# Altium PCB PCM2706 USB DAC Stick (Rev.5).PcbDoc
Units mil, origin at the board's own origin, x right, y up, seen from the top; angles counter-clockwise.
Board outline 2620 x 732.44 mil, 2 copper layers (Top Layer, Bottom Layer); 29 components, 21 nets, 93 pads, 20 vias.
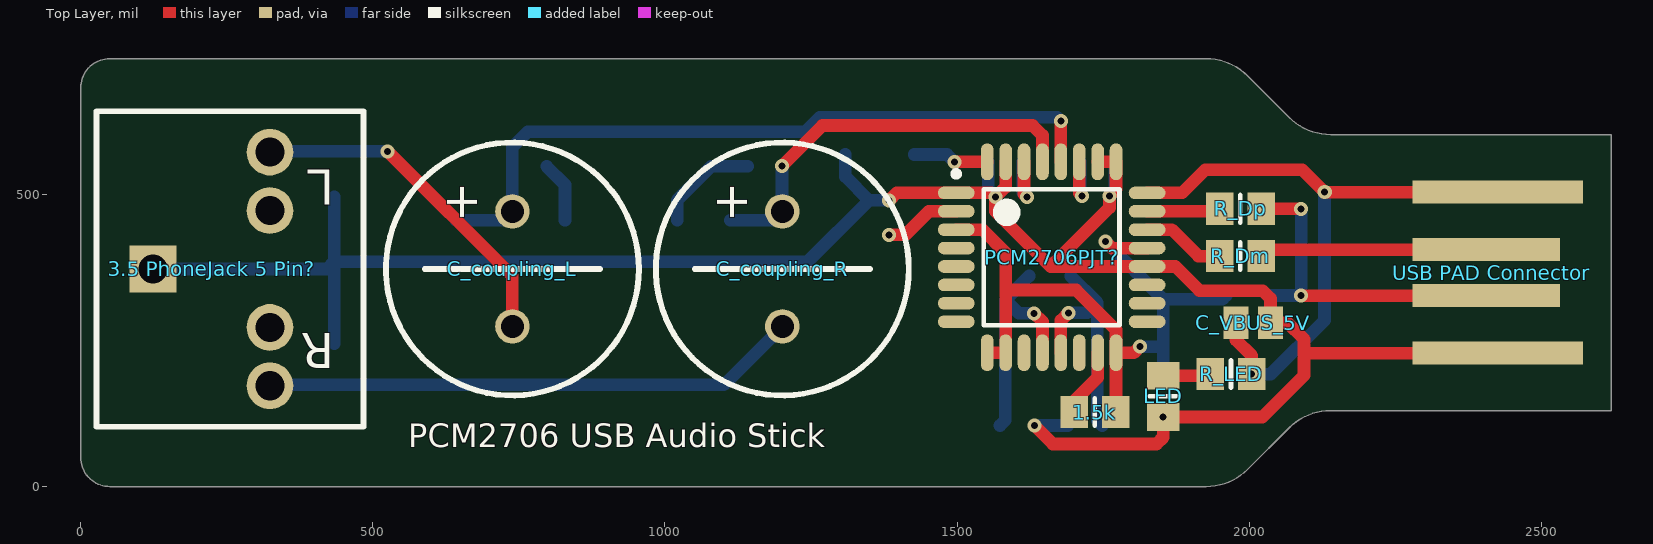
[diagram p0: Top Layer view]
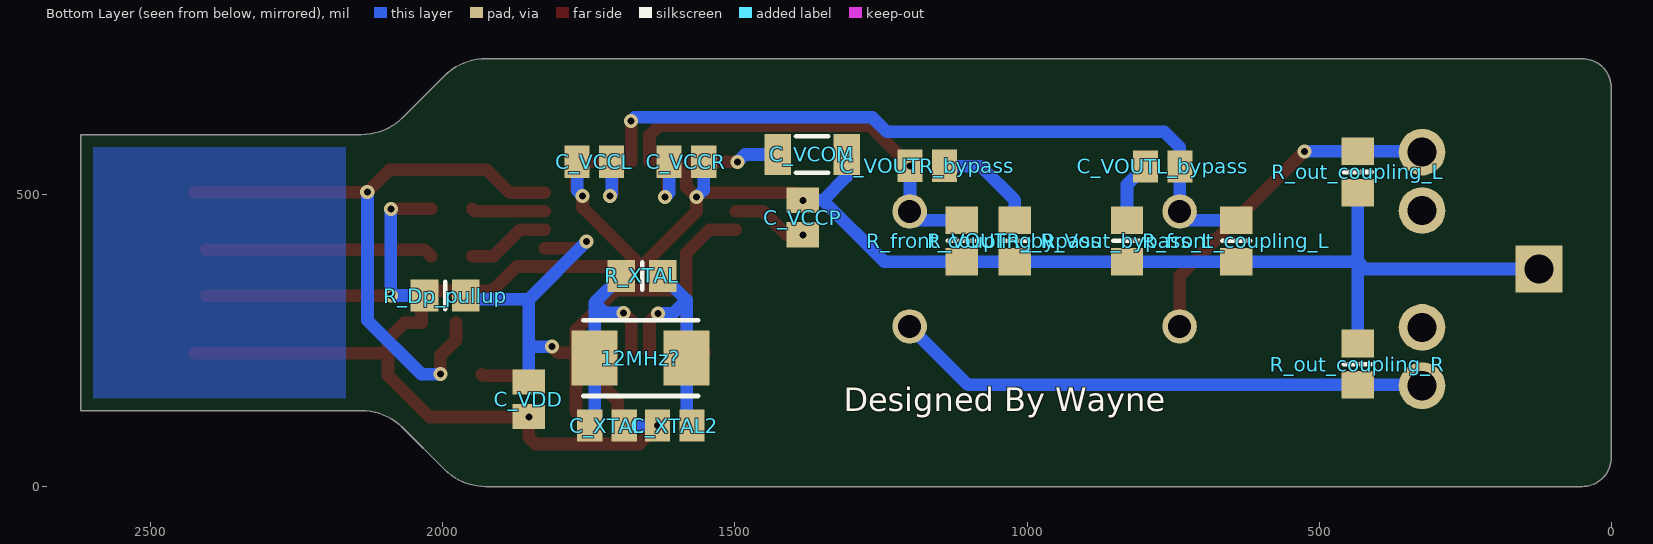
[diagram p1: Bottom Layer view, seen from below]

## Layer stack, top to bottom
Top Layer: signal copper 1.4
Dielectric: dielectric 12.6, FR-4, Dk 4.8
Bottom Layer: signal copper 1.4

## Board outline
50,0 cw(c50,50) 0,50 0,682.44 cw(c50,682.44) 50,732.44 1889.26,732.44 1926.58,732.44 cw(c1926.58,632.44) 1997.29,703.15 2062.64,637.8 2068.71,631.73 ccw(c2139.42,702.44) 2139.42,602.44 2176.74,602.44 2620,602.44 2620,130 2176.74,130 2139.42,130 ccw(c2139.42,30) 2068.71,100.71 2062.64,94.64 2003.36,35.36 1997.29,29.29 cw(c1926.58,100) 1926.58,0 50,0

## Design rules (kind name [scope] priority, off if disabled: settings)
Clearance [All] p1: gap=7
PolygonConnect [All] p1: connectstyle=Relief reliefconductorwidth=10 reliefentries=4 polygonreliefangle="90 Angle"
RoutingCorners [All] p1: cornerstyle=Round minsetback=100 maxsetback=100
RoutingVias [All] p1: holewidth=12 width=24 viastyle="Through Hole" minholewidth=12 minwidth=24 maxholewidth=12 maxwidth=24
SilkscreenOverComponentPads [All] p1: minsilkscreentomaskgap=10
SolderMaskExpansion [All] p1: expansion=1
Width [All] p1: maxlimit=21.65 minlimit=21.65 preferedwidth=21.65
26 further rules are at their usual default settings.

## Components (designator, comment, footprint, x,y, rotation, side; value= is the part's Value field where it differs from the comment)
1.5k "R_DT_pullup" 6-0805_N 1736,127.44 r180 top
"3.5 PhoneJack 5 Pin?" "3.5 PhoneJack 5 Pin" "3.5 PHONEJACK 5 PIN" 124,372.44 r180 top
12MHz? "XTAL" CAPM5032X13N 1819,314.44 r0 bottom
C_coupling_L "Cap Pol1" "SOLID CAP (D)10MM" 739,372.44 r90 top
C_coupling_R "Cap Pol1" "SOLID CAP (D)10MM" 1201,372.44 r90 top
C_VBUS_5V "" C0805 2007,280.44 r0 top
C_VCCL "" C0805 1740.74,555.83 r0 bottom
C_VCCP "" C0805 1384,460.44 r90 bottom
C_VCCR "" C0805 1583.26,555.83 r180 bottom
C_VCOM "" CAPC3216X12N 1368,568.44 r180 bottom
C_VDD "" C0805 1853,149.44 r270 bottom
C_VOUTL_bypass "" C0805 768,548 r0 bottom
C_VOUTR_bypass "" C0805 1171,549 r180 bottom
C_XTAL "" C0805 1719,104.44 r180 bottom
C_XTAL2 "" C0805 1603,104.44 r0 bottom
LED "" 6-0805_N 1853,154.44 r270 top
PCM2706PJT? "PCM2706PJT" TQFP80P900X900X120-32N 1662,392.44 r0 top
R_Dm "22" 6-0805_N 1985,394.44 r180 top
R_Dp "22" 6-0805_N 1985,475.44 r180 top
R_Dp_pullup "1.5k" 6-0805_N 1996,326.98 r0 bottom
R_front_coupling_L "3.3k" 6-0805_N 642,420.44 r90 bottom
R_front_coupling_R "3.3k" 6-0805_N 1112,420.44 r90 bottom
R_LED "330" 6-0805_N 1969,192.44 r180 top
R_out_coupling_L "3.3k" 6-0805_N 434,538.44 r90 bottom
R_out_coupling_R "3.3k" 6-0805_N 434,209.44 r270 bottom
R_Vout_bypass_L "16" 6-0805_N 829,420.44 r270 bottom
R_VOUTR_bypass "16" 6-0805_N 1021,420.44 r90 bottom
R_XTAL "1M" 6-0805_N 1659,360.44 r180 bottom
"USB PAD Connector" "USB PAD Connector" "USB A PAD CONNECTOR" 2620,602.44 r180 top

## Footprints (in the part's own frame and the unit in brackets; to place one, negate y for a bottom-side part, rotate by r counter-clockwise, add the part's x,y. Pads: shape width x height; smd on the part's side, far side on the other; paste and mask are expansions set on the pad)
"3.5 PHONEJACK 5 PIN" [mil] "3.5 PhoneJack 5 Pin"
  rect 80x80 hole 50: COM(0,0)
  round 80 hole 50: L_NC(-200,-100) L_NO(-200,-200) R_NC(-200,100) R_NO(-200,200)
  silkscreen extent -360,-270 97,270
6-0805_N [mm] "Chip Resistor, Body 2.0x1.2mm, IPC Medium Density"
  rect 1.2x1.4 smd: 1(-0.9,0) 2(0.9,0)
  silkscreen extent 0,-0.6 0,0.6, body extent -1.07,-0.7 1.07,0.7, height 0.7
C0805 [mm] "Chip Capacitor, Body 2.0x1.3mm, IPC High Density"
  rect 1.1x1.4 smd: 1(-0.75,0) 2(0.75,0)
  body extent -1.1,-0.72 1.1,0.72, height 1.4
CAPC3216X12N [mm] "Chip Capacitor, 2-Leads, Body 3.2x1.6mm, IPC Medium Density"
  rect 1.15x1.8 smd: 1(-1.5,0) 2(1.5,0)
  silkscreen extent -0.7,-0.8 0.7,0.8, body extent -1.6,-0.8 1.6,0.8, height 1.25
CAPM5032X13N [mm] "Molded Capacitor, 2-Leads, Body 5.0x3.2mm, IPC Medium Density"
  rect 2x2.4 smd: 1(-6,2.4) 2(-2,2.4)
  silkscreen extent -6.5,0.75 -1.5,4.05, body extent -6.5,0.8 -1.5,4, height 1.3
"SOLID CAP (D)10MM" [mm] "Capacitor (Radial); 2 Leads"
  round 1.5 hole 1: 1(2.5,0) 2(-2.5,0)
  silkscreen extent -5.5,-5.5 5.5,5.5
TQFP80P900X900X120-32N [mm] "TQFP, 32-Leads, Body 9.0x9.0mm (max), Pitch 0.80mm, IPC Medium Density"
  oval 1.6x0.55 smd: 1(-4.15,2.8) 2(-4.15,2) 3(-4.15,1.2) 4(-4.15,0.4) 5(-4.15,-0.4) 6(-4.15,-1.2) 7(-4.15,-2) 8(-4.15,-2.8) 17(4.15,-2.8) 18(4.15,-2) 19(4.15,-1.2) 20(4.15,-0.4) 21(4.15,0.4) 22(4.15,1.2) 23(4.15,2) 24(4.15,2.8)
  oval 0.55x1.6 smd: 9(-2.8,-4.15) 10(-2,-4.15) 11(-1.2,-4.15) 12(-0.4,-4.15) 13(0.4,-4.15) 14(1.2,-4.15) 15(2,-4.15) 16(2.8,-4.15) 25(2.8,4.15) 26(2,4.15) 27(1.2,4.15) 28(0.4,4.15) 29(-0.4,4.15) 30(-1.2,4.15) 31(-2,4.15) 32(-2.8,4.15)
  silkscreen extent -4.27,-2.95 2.95,3.75, body extent -3.5,-3.5 3.5,3.5, height 1.2
"USB A PAD CONNECTOR" [mm]
  rect 6.41x1 smd: D+(5.445,7) D-(5.445,5)
  rect 7.41x1 smd: Gnd(4.945,9.5) Vbus(4.945,2.5)

## Part data
1.5k R_Dm R_Dp R_Dp_pullup R_front_coupling_L R_front_coupling_R R_LED R_out_coupling_L R_out_coupling_R R_Vout_bypass_L R_VOUTR_bypass R_XTAL: library part "Res Thermal", "Thermistor"
12MHz?: "Crystal Oscillator"
C_coupling_L C_coupling_R: "Polarized Capacitor (Radial)"
C_VBUS_5V C_VCCL C_VCCP C_VCCR C_VCOM C_VDD C_VOUTL_bypass C_VOUTR_bypass C_XTAL C_XTAL2: library part "Cap Pol3", "Polarized Capacitor (Surface Mount)"
LED: library part LED2, "Typical RED, GREEN, YELLOW, AMBER GaAs LED"

## Via types
v1: diameter 24, hole 12, Top Layer to Bottom Layer, 20 vias

## Nets (pads, with @x,y where several pads share a name; then routed paths per layer and width w, separated by ;. In a path a pad name is that pad's centre, name@x,y a point inside that pad or via, vN(x,y) a via of type N, cw(c..) or ccw(c..) an arc to the next point about the centre after c; other vN are vias at no path point)
GND: "3.5 PhoneJack 5 Pin?.COM" "USB PAD Connector.Gnd" C_VBUS_5V.2 C_VCCL.2 C_VCCP.2 C_VCCR.2 C_VCOM.2 C_VDD.2 C_XTAL2.2 C_XTAL.2 LED.2 PCM2706PJT?.1 PCM2706PJT?.20 PCM2706PJT?.25 PCM2706PJT?.26 PCM2706PJT?.31 R_front_coupling_L.1 R_front_coupling_R.1 R_out_coupling_L.1 R_out_coupling_R.1 R_Vout_bypass_L.2 R_VOUTR_bypass.1 | length 3958.7
  Top Layer w21.65: v1(1384,489.97) 1396.71,502.68 PCM2706PJT?.1 1558.76,502.68 v1(1566,495.44) ; PCM2706PJT?.31 1583.26,512.7 v1(1566,495.44) ; v1(1632.53,104.44) 1664.02,72.94 1841.5,72.94 1853,84.44 v1(1853,119.01) 2022.57,119.01 2094,190.44 2094,228.42 ; PCM2706PJT?.26 PCM2706PJT?.25 1772.24,508.68 v1(1761,497.44) 1761,477.44 1660.25,376.69 ; 2425.32,228.42 2094,228.42 ; v1(1566,495.44) 1566,470.94 1660.25,376.69 ; 1660.25,376.69 PCM2706PJT?.20 1873.75,376.69 1915,335.44 2022.98,335.44 2036.53,321.89 C_VBUS_5V.2 2066,280.44 2094,252.44 2094,228.42
  Bottom Layer w21.65: 124,372.44 421.43,372.44 434,385.01 ; R_out_coupling_R.1 434,385.01 ; R_out_coupling_L.1@434,496.12 434,385.01 ; C_VCOM.2 1308.94,530.5 1349.47,489.97 ; v1(1384,489.97) 1349.47,489.97 ; C_VCCR.2 1553.73,507.71 v1(1566,495.44) ; v1(1632.53,104.44) C_XTAL.2 ; v1(1761,497.44) 1770.27,506.71 C_VCCL.2 ; 434,385.01 R_front_coupling_L.1 R_Vout_bypass_L.2 R_VOUTR_bypass.1 R_front_coupling_R.1 1244.51,385.01 1349.47,489.97
Net1.5k_2: 1.5k.2 PCM2706PJT?.15 | length 112.7
  Top Layer w21.65: 1.5k.2@1700.57,132.97 1700.57,146.01 1740.74,186.18 PCM2706PJT?.15
"Net3.5 PhoneJack 5 Pin?_L_NO": "3.5 PhoneJack 5 Pin?.L_NO" C_coupling_L.2 R_out_coupling_L.2 | length 588.4
  Top Layer w21.65: v1(525.57,573.87) 739,360.44 C_coupling_L.2
  Bottom Layer w21.65: 325.43,573.87 R_out_coupling_L.2 v1(525.57,573.87)
"Net3.5 PhoneJack 5 Pin?_R_NO": "3.5 PhoneJack 5 Pin?.R_NO" C_coupling_R.2 R_out_coupling_R.2 | length 916.9
  Bottom Layer w21.65: 325.57,174.01 R_out_coupling_R.2 1100.99,174.01 C_coupling_R.2
Net12MHz?_1: 12MHz?.1 C_XTAL2.1 PCM2706PJT?.12 R_XTAL.2 | length 408.9
  Top Layer w21.65: v1(1632,296.44) 1646.25,282.19 PCM2706PJT?.12
  Bottom Layer w21.65: C_XTAL2.1 1582.78,113.75 12MHz?.1 1582.78,319.65 ; R_XTAL.2 1582.78,319.65 ; v1(1632,296.44) 1605.99,296.44 1582.78,319.65
Net12MHz?_2: 12MHz?.2 C_XTAL.1 PCM2706PJT?.13 R_XTAL.1 | length 408.7
  Top Layer w21.65: PCM2706PJT?.13 1677.75,284.19 v1(1691,297.44)
  Bottom Layer w21.65: v1(1691,297.44) 1723.09,297.44 1740.26,314.61 ; R_XTAL.1 1740.26,314.61 ; C_XTAL.1 1740.26,112.71 12MHz?.2 1740.26,314.61
NetC_coupling_L_1: C_coupling_L.1 C_VOUTL_bypass.1 PCM2706PJT?.28 R_front_coupling_L.2 | length 1239.3
  Top Layer w21.65: PCM2706PJT?.28 v1(1677.75,626)
  Bottom Layer w21.65: R_front_coupling_L.2 C_coupling_L.1@738.99,455.87 ; C_coupling_L.1@738.47,471.39 C_VOUTL_bypass.1 738.47,580.47 765.44,607.44 1240.44,607.44 1265,632 1671.75,632 v1(1677.75,626)
NetC_coupling_R_1: C_coupling_R.1 C_VOUTR_bypass.1 PCM2706PJT?.29 R_front_coupling_R.2 | length 700.2
  Top Layer w21.65: v1(1200.53,549) 1269.53,618 1629.44,618 1646.25,601.19 PCM2706PJT?.29
  Bottom Layer w21.65: R_front_coupling_R.2 1186.01,455.87 C_coupling_R.1 1200.53,471.34 v1(1200.53,549)
NetC_VBUS_5V_1: "USB PAD Connector.Vbus" C_VBUS_5V.1 PCM2706PJT?.24 R_LED.1 | length 1113.3
  Top Layer w21.65: PCM2706PJT?.24 1885.24,502.68 1925,542.44 2090.57,542.44 v1@2129,504.01 ; C_VBUS_5V.1 1977.47,250.97 2004.43,224.01 v1(2004.43,192.44) ; v1(2129.43,504.01) 2425.32,504.01
  Bottom Layer w21.65: v1(2004.43,192.44) 2037,192.44 2129,284.44 v1@2129,504.01
NetC_VCCL_1: C_VCCL.1 PCM2706PJT?.27 | length 119.9
  Top Layer w21.65: PCM2706PJT?.27 1709.24,502.2 v1(1714,497.44)
  Bottom Layer w21.65: C_VCCL.1 1711.21,500.23 v1(1714,497.44)
NetC_VCCP_1: C_VCCP.1 PCM2706PJT?.2 | length 131.3
  Top Layer w21.65: v1(1384,430.91) 1411.47,430.91 1451.74,471.18 PCM2706PJT?.2
NetC_VCCR_1: C_VCCR.1 PCM2706PJT?.30 | length 125.9
  Top Layer w21.65: PCM2706PJT?.30 1614.76,500.68 v1(1620,495.44)
  Bottom Layer w21.65: C_VCCR.1 1612.79,502.65 v1(1620,495.44)
NetC_VCOM_1: C_VCOM.1 PCM2706PJT?.32 | length 129.9
  Top Layer w21.65: v1(1495.61,555.83) PCM2706PJT?.32
  Bottom Layer w21.65: C_VCOM.1 1483,568.44 v1(1495.61,555.83)
NetC_VOUTL_bypass_2: C_VOUTL_bypass.2 R_Vout_bypass_L.1 | length 105.2
  Bottom Layer w21.65: C_VOUTL_bypass.2 829,516.53 R_Vout_bypass_L.1
NetC_VOUTR_bypass_2: C_VOUTR_bypass.2 R_VOUTR_bypass.2 | length 178.8
  Bottom Layer w21.65: R_VOUTR_bypass.2 1021,490 1079.44,548.44 C_VOUTR_bypass.2@1141.47,548.44
NetLED_1: LED.1 R_LED.2 | length 81.6
  Top Layer w21.65: LED.1 1931,189.87 R_LED.2
NetPCM2706PJT?_22: PCM2706PJT?.22 R_Dm.2 | length 142.9
  Top Layer w21.65: PCM2706PJT?.22 1867.76,439.68 1913,394.44 R_Dm.2
NetPCM2706PJT?_23: PCM2706PJT?.23 R_Dp.2 | length 125.9
  Top Layer w21.65: PCM2706PJT?.23 1945.31,471.18 R_Dp.2
NetR_Dm_1: "USB PAD Connector.D-" R_Dm.1 | length 389.8
  Top Layer w21.65: R_Dm.1 2031.58,405.59 2405.63,405.59
NetR_Dp_1: "USB PAD Connector.D+" R_Dp.1 R_Dp_pullup.2 | length 591.1
  Top Layer w21.65: R_Dp.1 v1(2089,475.44) ; v1(2089.13,326.85) 2405.63,326.85
  Bottom Layer w21.65: R_Dp_pullup.2 2089,326.98 v1(2089,475.44)
VCC: 1.5k.1 C_VDD.1 PCM2706PJT?.3 PCM2706PJT?.9 PCM2706PJT?.10 PCM2706PJT?.16 PCM2706PJT?.21 R_Dp_pullup.1 | length 1213.7
  Top Layer w21.65: PCM2706PJT?.3 1543.76,439.68 1583.26,400.18 PCM2706PJT?.10 PCM2706PJT?.9 ; 1583.26,336.44 1704,336.44 1772.24,268.2 PCM2706PJT?.16 ; v1(1754,419.44) 1765.25,408.19 PCM2706PJT?.21 ; 1.5k.1@1772.24,128.24 PCM2706PJT?.16 ; v1(1813,239.44) 1802.61,229.05 PCM2706PJT?.16
  Bottom Layer w21.65: v1(1754,419.44) 1853,320.44 ; v1(1813,239.44) 1853,239.44 ; C_VDD.1 1853,239.44 ; R_Dp_pullup.1 1954.02,320.44 1853,320.44 ; 1853,239.44 1853,320.44
pads on no net: "3.5 PhoneJack 5 Pin?.L_NC" "3.5 PhoneJack 5 Pin?.R_NC" PCM2706PJT?.4 PCM2706PJT?.5 PCM2706PJT?.6 PCM2706PJT?.7 PCM2706PJT?.8 PCM2706PJT?.11 PCM2706PJT?.14 PCM2706PJT?.17 PCM2706PJT?.18 PCM2706PJT?.19

## Polygon pours and split planes (outlines as drawn)
no net on Bottom Layer "Top Layer-No Net" (solid, pour order 9): 2166,130 2166,602.44 2620,602.44 2620,130

## Silkscreen, mask and mechanical layers (free items; w line width, h text height)
Top Overlay:
  text "PCM2706 USB Audio Stick" at 561,67 h40
Bottom Overlay:
  text "Designed By Wayne" at 1314,129 h40
Mechanical 13:
  lines w2: 0,50 ccw(c50,50) 50,0 1918,0 ccw(c1918,120.71) 2003.36,35.36 2062.64,94.64 cw(c2148,9.29) 2148,130 2620,130 2620,602.44 2148,602.44 cw(c2148,723.15) 2062.64,637.8 2003.36,697.08 ccw(c1918,611.73) 1918,732.44 50,732.44 ccw(c50,682.44) 0,682.44 0,50

## Text inside footprints (layer, text, board x,y; h text height)
"3.5 PhoneJack 5 Pin?": Top Overlay "R" at 434,262.44 h60 r180; Top Overlay "L" at 434,542.44 h60 r180
C_coupling_L: Top Overlay "+" at 679,452.44 h60 r90
C_coupling_R: Top Overlay "+" at 1141,452.44 h60 r90